# Altium PCB ADAS_ECU_MB_revA.PcbDoc (part 4 of 6)
Units mm, origin at the board's own origin, x right, y up, seen from the top; angles counter-clockwise.
Board outline 180 x 120 mm, 6 copper layers (Top Layer, Mid Layer 1, Mid Layer 2, Mid Layer 3, Mid Layer 4, Bottom Layer), stack 1.554 mm thick; 648 components, 505 nets, 4389 pads, 80 vias.
Unrouted connection lines stored in the file: 197.
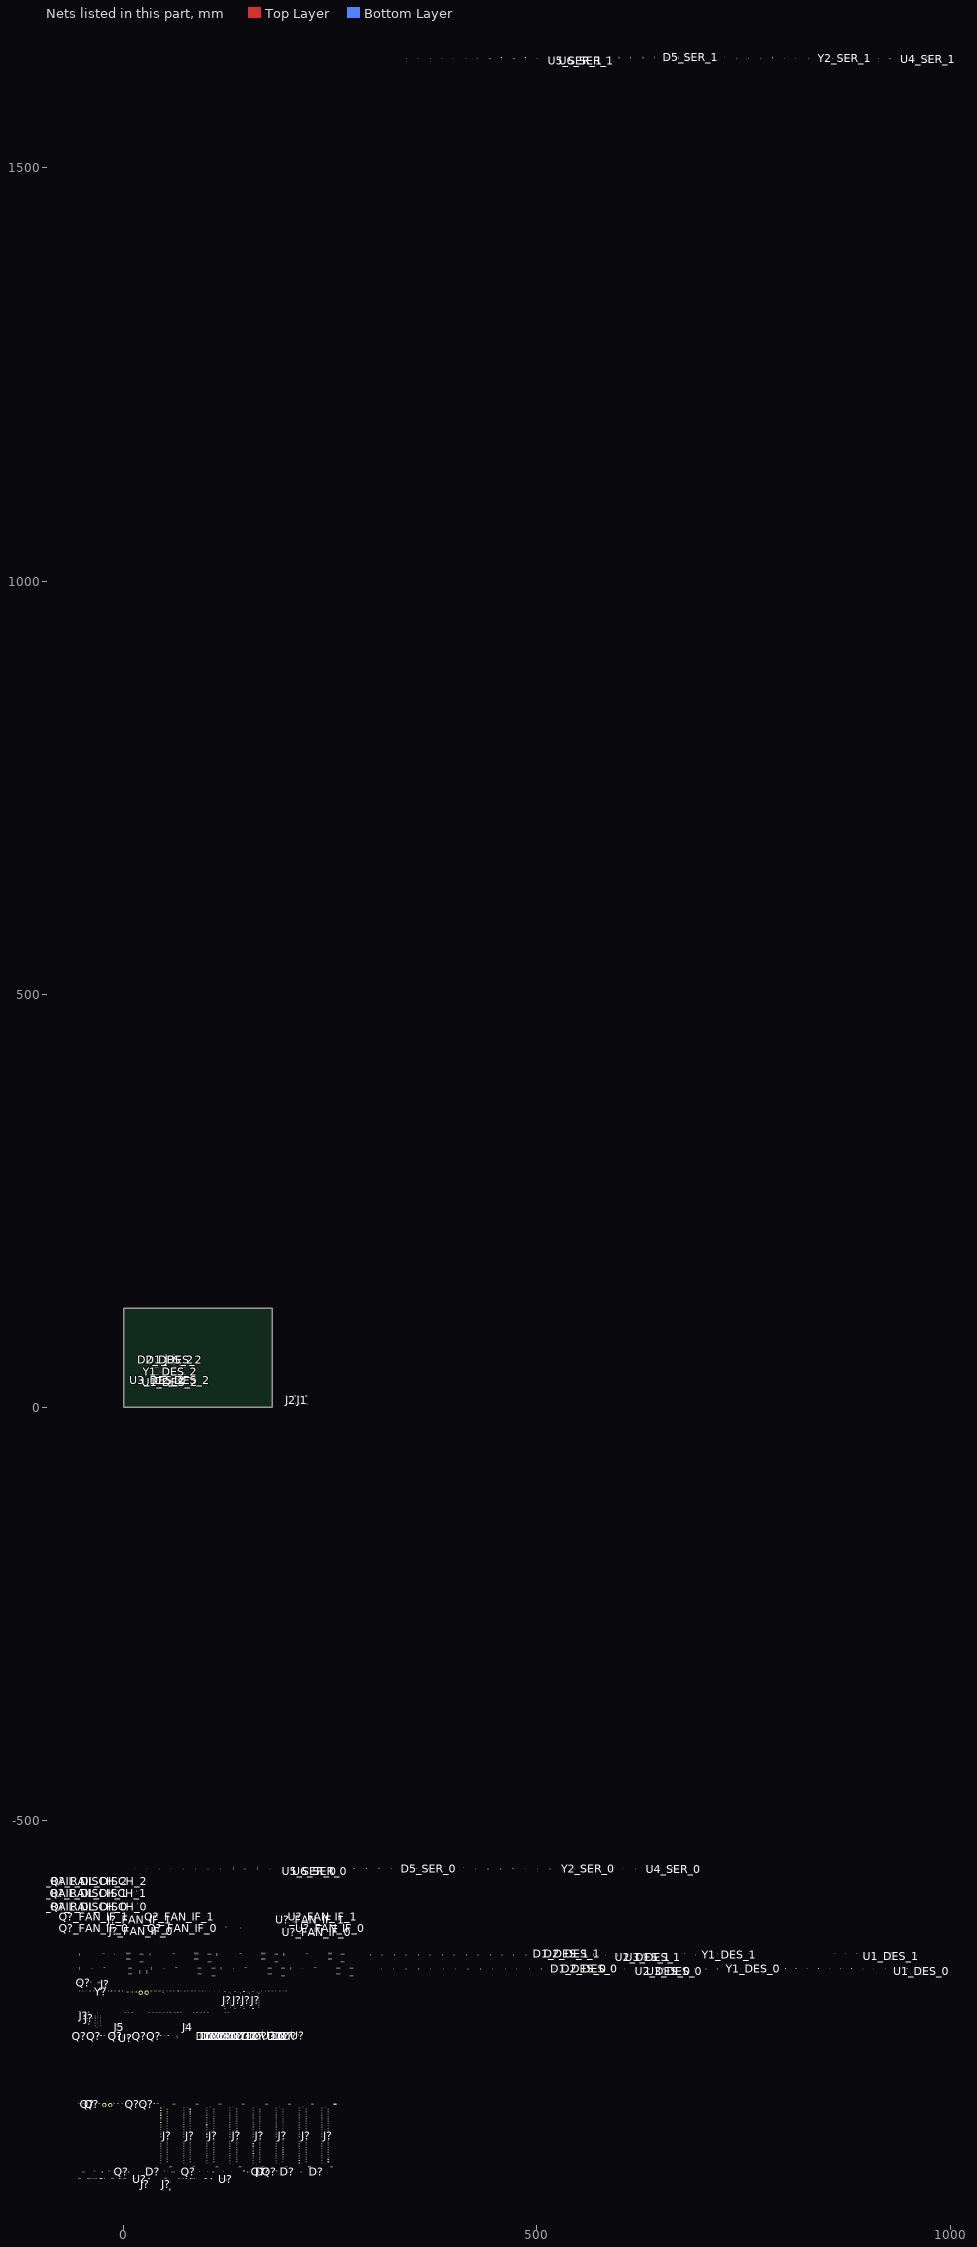
[diagram p3: the nets of this part, all layers, seen from the top]

## Via types
v1: diameter 0.5, hole 0.2, Top Layer to Bottom Layer, 66 vias
v2: diameter 0.5, hole 0.3, Top Layer to Bottom Layer, 12 vias
v3: diameter 0.75, hole 0.5, Top Layer to Bottom Layer, 2 vias

## Nets (pads, with @x,y where several pads share a name; then routed paths per layer and width w, separated by ;. In a path a pad name is that pad's centre, name@x,y a point inside that pad or via, vN(x,y) a via of type N, cw(c..) or ccw(c..) an arc to the next point about the centre after c; other vN are vias at no path point) (continued)
DP1_TXD1_P: D?.5@196.211,-762.081 D?.6@197.046,-762.081 J?.71@44.528,-865.206
DP1_TXD2_N: D?.1@165.211,-760.081 D?.10@166.046,-760.081 J?.75@44.528,-866.206
DP1_TXD2_P: D?.2@165.211,-760.581 D?.9@166.046,-760.581 J?.77@44.528,-866.706
DP1_TXD3_N: D?.4@165.211,-761.581 D?.7@166.046,-761.581 J?.81@100.528,-867.706
DP1_TXD3_P: D?.5@165.211,-762.081 D?.6@166.046,-762.081 J?.83@100.528,-868.206
DP_D0_N: C?.1@288.262,-924.081
DP_D0_P: C?.1@297.262,-924.081
DP_D1_N: C?.1@271.262,-924.081
DP_D1_P: C?.1@279.262,-924.081
DP_D2_N: C?.1@253.262,-924.081
DP_D2_P: C?.1@262.262,-924.081
DP_D3_N: C?.1@236.262,-924.081
DP_D3_P: C?.1@245.262,-924.081
DP_HDMI_CEC: D?.1@34.678,-924.431 Q?.2@77.678,-925.731 R?.1@107.903,-925.081
DP_HPD: Q?.3@164.578,-925.081 R?.1@144.978,-924.081
ENABLE_FAN_IF_0: R?_FAN_IF_0.1@141.628,-629.705 R?_FAN_IF_0.2@283.628,-628.58
ENABLE_FAN_IF_1: R?_FAN_IF_1.1@135.628,-615.705 R?_FAN_IF_1.2@274.628,-614.58
FAN_PWM_FAN_IF_0: R?_FAN_IF_0.1@-18.372,-629.705
FAN_PWM_FAN_IF_1: R?_FAN_IF_1.1@-19.372,-615.705
FAN_TACH_FAN_IF_0: R?_FAN_IF_0.1@34.628,-629.705
FAN_TACH_FAN_IF_1: R?_FAN_IF_1.1@32.628,-615.705
FAN_VCC_FAN_IF_0: J?_FAN_IF_0.2 U?_FAN_IF_0.2 U?_FAN_IF_0.3@250.278,-631.205
FAN_VCC_FAN_IF_1: J?_FAN_IF_1.2 U?_FAN_IF_1.2 U?_FAN_IF_1.3@241.278,-617.205
FAN_VDDIO_FAN_IF_0: C?.1@169.15,-760.081 C?.1@204.15,-760.081 C?.1@-14.174,-760.081 Q?.1@9.678,-842.431 Q?.1@18.678,-760.431 Q?.1@26.678,-842.431 Q?.1@35.678,-760.431 Q?.1@-10.322,-760.431 Q?.1@-36.322,-760.431 Q?.1@-54.322,-760.431 Q?_FAN_IF_0.1@70.978,-631.03 Q?_FAN_IF_1.1@66.978,-617.03 R?.1@-53.872,-924.081 R?.2@11.278,-760.081 R?.2@19.278,-842.081 R?.2@28.278,-760.081 R?.2@37.278,-842.081 R?.2@45.278,-760.081 R?.2@54.353,-760.081 R?.2@66.278,-706.081 R?.2@149.278,-760.081 R?.2@180.278,-760.081 R?.2@207.128,-924.081 R?.2@-26.722,-760.081 R?.2@-38.647,-695.081 R?.2@-43.722,-760.081 R?_FAN_IF_0.1@52.628,-630.73 R?_FAN_IF_1.1@49.628,-615.73 U?.2@-0.322,-763.081 U?.4@5.578,-763.081 U?.5@176.398,-759.431 U?.5@211.398,-759.431
GAIN_1: R?.1@65.903,-933.081 R?.2@31.353,-933.081 TP?.1@59.628,-932.081 U?.2@122.203,-933.831
GAIN_2: R?.1@-43.097,-933.081 R?.2@-52.647,-933.081 TP?.1@-49.372,-932.081 U?.2@18.203,-933.831
GBE_LED_ACT: J?.194@192.728,-897.956
GBE_LED_LINK: J?.188@192.728,-896.456
GBE_MDI0_N: D?.1@183.211,-760.081 D?.10@184.046,-760.081 J?.184@192.728,-895.456
GBE_MDI0_P: D?.2@183.211,-760.581 D?.9@184.046,-760.581 J?.186@192.728,-895.956
GBE_MDI1_N: D?.4@183.211,-761.581 D?.7@184.046,-761.581 J?.190@192.728,-896.956
GBE_MDI1_P: D?.5@183.211,-762.081 D?.6@184.046,-762.081 J?.192@192.728,-897.456
GBE_MDI2_N: D?.1@152.211,-760.081 D?.10@153.046,-760.081 J?.196@192.728,-898.456
GBE_MDI2_P: D?.2@152.211,-760.581 D?.9@153.046,-760.581 J?.198@192.728,-898.956
GBE_MDI3_N: D?.4@152.211,-761.581 D?.7@153.046,-761.581 J?.202@192.728,-899.956
GBE_MDI3_P: D?.5@152.211,-762.081 D?.6@153.046,-762.081 J?.204@192.728,-900.456
GND: C9_DES_0.1 C9_DES_1.1 C9_DES_2.1 C10_DES_0.1 C10_DES_1.1 C10_DES_2.1 C11_DES_0.1 C11_DES_1.1 C11_DES_2.1 C12_DES_0.2 C12_DES_1.2 C12_DES_2.2 C13_DES_0.1 C13_DES_1.1 C13_DES_2.1 C14_DES_0.2 C14_DES_1.2 C14_DES_2.2 C15_DES_0.1 C15_DES_1.1 C15_DES_2.1 C16_DES_0.1 C16_DES_1.1 C16_DES_2.1 C17_DES_0.1 C17_DES_1.1 C17_DES_2.1 C18_DES_0.1 C18_DES_1.1 C18_DES_2.1 C19_DES_0.1 C19_DES_1.1 C19_DES_2.1 C20_DES_0.1 C20_DES_1.1 C20_DES_2.1 C21_DES_0.1 C21_DES_1.1 C21_DES_2.1 C22_DES_0.1 C22_DES_1.1 C22_DES_2.1 C23_DES_0.1 C23_DES_1.1 C23_DES_2.1 C24_DES_0.1 C24_DES_1.1 C24_DES_2.1 C25_DES_0.1 C25_DES_1.1 C25_DES_2.1 C26_DES_0.1 C26_DES_1.1 C26_DES_2.1 C27_DES_0.1 C27_DES_1.1 C27_DES_2.1 C28_DES_0.1 C28_DES_1.1 C28_DES_2.1 C29_DES_0.1 C29_DES_1.1 C29_DES_2.1 C30_DES_0.1 C30_DES_1.1 C30_DES_2.1 C31_DES_0.2 C31_DES_1.2 C31_DES_2.2 C32_DES_0.2 C32_DES_1.2 C32_DES_2.2 C33_DES_0.2 C33_DES_1.2 C33_DES_2.2 C34_DES_0.2 C34_DES_1.2 C34_DES_2.2 C44_SER_0.2 C44_SER_1.2 C45_SER_0.2 C45_SER_1.2 C49_SER_0.1 C49_SER_1.1 C50_SER_0.2 C50_SER_1.2 C51_SER_0.1 C51_SER_1.1 C52_SER_0.2 C52_SER_1.2 C53_SER_0.2 C53_SER_1.2 C54_SER_0.2 C54_SER_1.2 C55_SER_0.2 C55_SER_1.2 C56_SER_0.2 C56_SER_1.2 C57_SER_0.2 C57_SER_1.2 C58_SER_0.2 C58_SER_1.2 C59_SER_0.2 C59_SER_1.2 C60_SER_0.2 C60_SER_1.2 C61_SER_0.2 C61_SER_1.2 C?.1@75.262,-933.081 C?.1@80.728,-933.081 C?.1@85.262,-933.081 C?.1@98.728,-933.081 C?.1@136.198,-924.081 C?.1@140.198,-924.081 C?.1@193.262,-924.081 C?.1@-1.738,-706.081 C?.1@-5.272,-933.081 C?.1@-5.738,-706.081 C?.1@-10.738,-706.081 C?.1@-14.738,-706.081 C?.1@-18.738,-706.081 C?.1@-19.738,-760.081 C?.1@-22.738,-924.081 C?.1@-23.738,-706.081 C?.1@-23.738,-933.081 C?.1@-28.272,-933.081 C?.1@-31.738,-924.081 C?.1@-33.738,-933.081 C?.1@-35.738,-695.081 C?.1@-49.738,-706.081 C?.2@5.43,-707.081 C?.2@10.43,-707.081 C?.2@15.43,-707.081 C?.2@74.103,-924.081 C?.2@90.091,-932.081 C?.2@95.091,-932.081 C?.2@170.107,-760.081 C?.2@172.028,-924.081 C?.2@205.107,-760.081 C?.2@211.028,-924.081 C?.2@-9.909,-932.081 C?.2@-11.57,-925.081 C?.2@-12.57,-760.081 C?.2@-18.909,-932.081 C?.2@-25.57,-925.081 C?.2@-27.897,-696.081 C?_FAN_IF_0.1 C?_FAN_IF_1.1 D1_DES_0.3 D1_DES_0.8 D1_DES_1.3 D1_DES_1.8 D1_DES_2.3 D1_DES_2.8 D2_DES_0.3 D2_DES_0.8 D2_DES_1.3 D2_DES_1.8 D2_DES_2.3 D2_DES_2.8 D5_SER_0.3 D5_SER_0.8 D5_SER_1.3 D5_SER_1.8 D?.3@96.211,-761.081 D?.3@101.211,-761.081 D?.3@105.211,-761.081 D?.3@109.211,-761.081 D?.3@114.211,-761.081 D?.3@118.211,-761.081 D?.3@122.211,-761.081 D?.3@126.211,-761.081 D?.3@131.211,-761.081 D?.3@135.211,-761.081 D?.3@139.211,-761.081 D?.3@144.211,-761.081 D?.3@152.211,-761.081 D?.3@157.211,-761.081 D?.3@161.211,-761.081 D?.3@165.211,-761.081 D?.3@168.211,-925.081 D?.3@183.211,-761.081 D?.3@188.211,-761.081 D?.3@192.211,-761.081 D?.3@196.211,-761.081 D?.3@198.211,-925.081 D?.3@201.211,-761.081 D?.3@233.211,-925.081 D?.8 J1.5 J1.6 J1.7 J1.8 J1.9 J2.5 J2.6 J2.7 J2.8 J2.9 J3.5 J3.6 J3.7 J3.8 J3.9 J4.2 J5.2 J?.1@44.528,-847.706 J?.1@121.728,-726.331 J?.1@-48.372,-739.891 J?.2@64.628,-760.811 J?.2@80.728,-847.956 J?.2@-44.452,-735.371 J?.3@26.178,-938.081 J?.3@121.728,-725.831 J?.4@26.178,-940.081 J?.5@-23.197,-696.781 J?.5@-44.452,-736.871 J?.6@-23.447,-700.881 J?.7@44.528,-849.206 J?.7@-23.447,-695.281 J?.8@80.728,-849.456 J?.8@-21.297,-698.081 J?.8@-44.452,-738.371 J?.9@121.728,-724.331 J?.11@-44.452,-739.871 J?.13@44.528,-850.706 J?.14@80.728,-850.956 J?.15@121.728,-722.831 J?.17@-44.452,-742.871 J?.19@44.528,-852.206 J?.20@80.728,-852.456 J?.20@-42.152,-746.331 J?.21@121.728,-721.331 J?.21@-42.152,-731.831 J?.22@-38.852,-739.081 J?.25@44.528,-853.706 J?.26@80.728,-853.956 J?.27@121.728,-719.831 J?.31@44.528,-855.206 J?.32@80.728,-855.456 J?.33@121.728,-718.331 J?.37@44.528,-856.706 J?.38@80.728,-856.956 J?.39@144.728,-716.831 J?.43@44.528,-858.206 J?.44@80.728,-858.456 J?.45@144.728,-715.331 J?.49@44.528,-859.706 J?.50@80.728,-859.956 J?.51@144.728,-713.831 J?.55@44.528,-861.206 J?.56@80.728,-861.456 J?.57@144.728,-712.331 J?.61@44.528,-862.706 J?.62@80.728,-862.956 J?.67@44.528,-864.206 J?.68@80.728,-864.456 J?.71@144.728,-708.831 J?.73@44.528,-865.706 J?.73@144.728,-708.331 J?.74@80.728,-865.956 J?.75@144.728,-707.831 J?.76@156.503,-727.431 J?.77@145.503,-706.731 J?.79@44.528,-867.206 J?.80@80.728,-867.456 J?.85@100.528,-868.706 J?.86@136.728,-868.956 J?.102@136.728,-872.956 J?.107@100.528,-874.206 J?.113@100.528,-875.706 J?.119@100.528,-877.206 J?.125@100.528,-878.706 J?.129@100.528,-879.706 J?.132@136.728,-880.456 J?.135@100.528,-881.206 J?.138@136.728,-881.956 J?.141@100.528,-882.706 J?.144@136.728,-883.456 J?.146@136.728,-885.956 J?.147@100.528,-886.206 J?.152@136.728,-887.456 J?.153@100.528,-887.706 J?.158@136.728,-888.956 J?.159@100.528,-889.206 J?.164@192.728,-890.456 J?.165@156.528,-890.706 J?.170@192.728,-891.956 J?.171@156.528,-892.206 J?.176@192.728,-893.456 J?.177@156.528,-893.706 J?.200@192.728,-899.456 J?.201@156.528,-899.706 J?.231@156.528,-907.206 J?.241@212.528,-909.706 J?.242@247.728,-909.956 J?.243@212.528,-910.206 J?.244@247.728,-910.456 J?.245@212.528,-910.706 J?.246@247.728,-910.956 J?.247@212.528,-911.206 J?.248@247.728,-911.456 J?.249@212.528,-911.706 J?.250@247.728,-911.956 J?.261@224.628,-918.831 J?.262@255.628,-843.331 J?_FAN_IF_0.1 J?_FAN_IF_1.1 MP?.1 Q?.1@-44.322,-842.431 Q?.2@162.678,-925.731 Q?.2@-3.322,-925.731 Q?.2@-49.322,-696.731 Q?.4@-37.422,-843.731 Q?_FAN_IF_0.2@-34.722,-631.03 Q?_FAN_IF_1.2@-34.722,-617.03 Q?_RAIL_DISCH_0.1@-54.022,-605.03 Q?_RAIL_DISCH_0.4@-28.722,-603.13 Q?_RAIL_DISCH_1.1@-54.022,-589.03 Q?_RAIL_DISCH_1.4@-29.722,-587.13 Q?_RAIL_DISCH_2.1@-54.022,-574.03 Q?_RAIL_DISCH_2.4@-28.722,-572.13 R1_DES_0.1 R1_DES_1.1 R1_DES_2.1 R3_DES_0.1 R3_DES_1.1 R3_DES_2.1 R4_DES_0.1 R4_DES_1.1 R4_DES_2.1 R7_DES_0.1 R7_DES_1.1 R7_DES_2.1 R8_DES_0.1 R8_DES_1.1 R8_DES_2.1 R9_DES_0.1 R9_DES_1.1 R9_DES_2.1 R10_DES_0.1 R10_DES_1.1 R10_DES_2.1 R11_DES_0.1 R11_DES_1.1 R11_DES_2.1 R16_SER_0.1 R16_SER_1.1 R17_SER_0.1 R17_SER_1.1 R24_SER_0.1 R24_SER_1.1 R27_SER_0.1 R27_SER_1.1 R28_SER_0.1 R28_SER_1.1 R29_SER_0.1 R29_SER_1.1 R?.1@5.903,-925.081 R?.1@29.903,-933.081 R?.1@37.778,-706.081 R?.1@42.778,-706.081 R?.1@91.903,-760.081 R?.1@149.903,-925.081 R?.1@-18.022,-924.081 R?.1@-40.872,-706.081 R?.1@-49.097,-842.081 R?.1@-49.097,-925.081 R?.1@-53.872,-706.081 R?.1@-54.097,-695.081 R?.1@-54.097,-842.081 R?.1@-54.097,-933.081 R?.2@6.128,-842.081 R?.2@11.128,-924.081 R?.2@-12.622,-933.081 R?.2@-43.872,-924.081 R?_FAN_IF_0.1@106.628,-630.805 R?_FAN_IF_0.2@123.628,-628.58 R?_FAN_IF_0.2@-54.372,-629.43 R?_FAN_IF_1.1@101.628,-616.805 R?_FAN_IF_1.2@118.628,-614.58 R?_FAN_IF_1.2@-54.372,-614.43 U1_DES_0.57 U1_DES_1.57 U1_DES_2.57 U2_DES_0.1 U2_DES_1.1 U2_DES_2.1 U3_DES_0.1 U3_DES_1.1 U3_DES_2.1 U4_SER_0.33 U4_SER_1.33 U5_SER_0.1 U5_SER_1.1 U6_SER_0.1 U6_SER_1.1 U?.1@-0.322,-760.781 U?.3@18.203,-934.331 U?.3@122.203,-934.331 U?.3@174.858,-760.731 U?.3@209.858,-760.731 U?.11 U?.15 U?.17 U?_FAN_IF_0.4@233.628,-632.08 U?_FAN_IF_1.4@225.628,-617.08 Y1_DES_0.2 Y1_DES_0.4 Y1_DES_1.2 Y1_DES_1.4 Y1_DES_2.2 Y1_DES_2.4 Y2_SER_0.2 Y2_SER_0.4 Y2_SER_1.2 Y2_SER_1.4 Y?.2
  other v1: 963.979,-683.731 965.079,-683.731 966.179,-683.731 967.279,-683.731 963.979,-682.631 965.079,-682.631 966.179,-682.631 967.279,-682.631 963.979,-681.531 965.079,-681.531 966.179,-681.531 967.279,-681.531 963.979,-680.431 965.079,-680.431 966.179,-680.431 967.279,-680.431 926.979,-665.73 928.079,-665.73 929.179,-665.73 930.279,-665.73 926.979,-664.63 928.079,-664.63 929.179,-664.63 930.279,-664.63 926.979,-663.53 928.079,-663.53 929.179,-663.53 930.279,-663.53 926.979,-662.43 928.079,-662.43 929.179,-662.43 930.279,-662.43 664.729,-560.18 665.829,-560.18 666.929,-560.18 664.729,-559.08 665.829,-559.08 666.929,-559.08 664.729,-557.98 665.829,-557.98 666.929,-557.98 56,28.167 55.222,28.944 56.778,28.944 54.444,29.722 56,29.722 57.556,29.722 53.667,30.5 55.222,30.5 56.778,30.5 58.333,30.5 54.444,31.278 56,31.278 57.556,31.278 55.222,32.056 56.778,32.056 56,32.833 972.101,1630.5 973.201,1630.5 974.301,1630.5 972.101,1631.6 973.201,1631.6 974.301,1631.6 972.101,1632.7 973.201,1632.7 974.301,1632.7
GPIO08_FAN_TACH: J?.208@192.728,-901.456
GPIO10_nSMB_ALERT: J?.212@192.728,-902.456 R?.1@178.978,-760.081 U?.4@176.398,-760.731
GPIO14_FAN_PWM: J?.230@192.728,-906.956
GPIO_01: J?.118@136.728,-876.956
GPIO_02: J?.124@136.728,-878.456
GPIO_03: J?.126@136.728,-878.956
GPIO_04: J?.127@100.528,-879.206
GPIO_05: J?.128@136.728,-879.456
GPIO_06: J?.130@136.728,-879.956
GPIO_07: J?.206@192.728,-900.956
GPIO_09: J?.211@156.528,-902.206
GPIO_11: J?.216@192.728,-903.456
GPIO_12: J?.218@192.728,-903.956
GPIO_13: J?.228@192.728,-906.456
HDMI_1V8: R?.2@146.278,-924.081 R?.2@-39.872,-924.081 R?.2@-52.872,-924.081
HDMI_CEC: C?.1@73.153,-924.081 D?.1@168.211,-924.081 D?.10@169.046,-924.081 J?.13@-44.452,-740.871 R?.2@88.128,-924.081
HDMI_CLK_N: D?.5@198.211,-926.081 D?.6@199.046,-926.081 J?.12@-44.452,-740.371 R?.2@242.128,-924.081
HDMI_CLK_P: D?.4@198.211,-925.581 D?.7@199.046,-925.581 J?.10@-44.452,-739.371 R?.2@250.128,-924.081
HDMI_D0_N: D?.2@198.211,-924.581 D?.9@199.046,-924.581 J?.9@-44.452,-738.871 R?.2@259.128,-924.081